# Altium PCB Project.PcbDoc
Units mm, origin at the board's own origin, x right, y up, seen from the top; angles counter-clockwise.
Board outline 70 x 75 mm, 4 copper layers (Top Layer, Layer 1, Layer 2, Bottom Layer), stack 1.641 mm thick; 75 components, 52 nets, 282 pads, 76 vias.
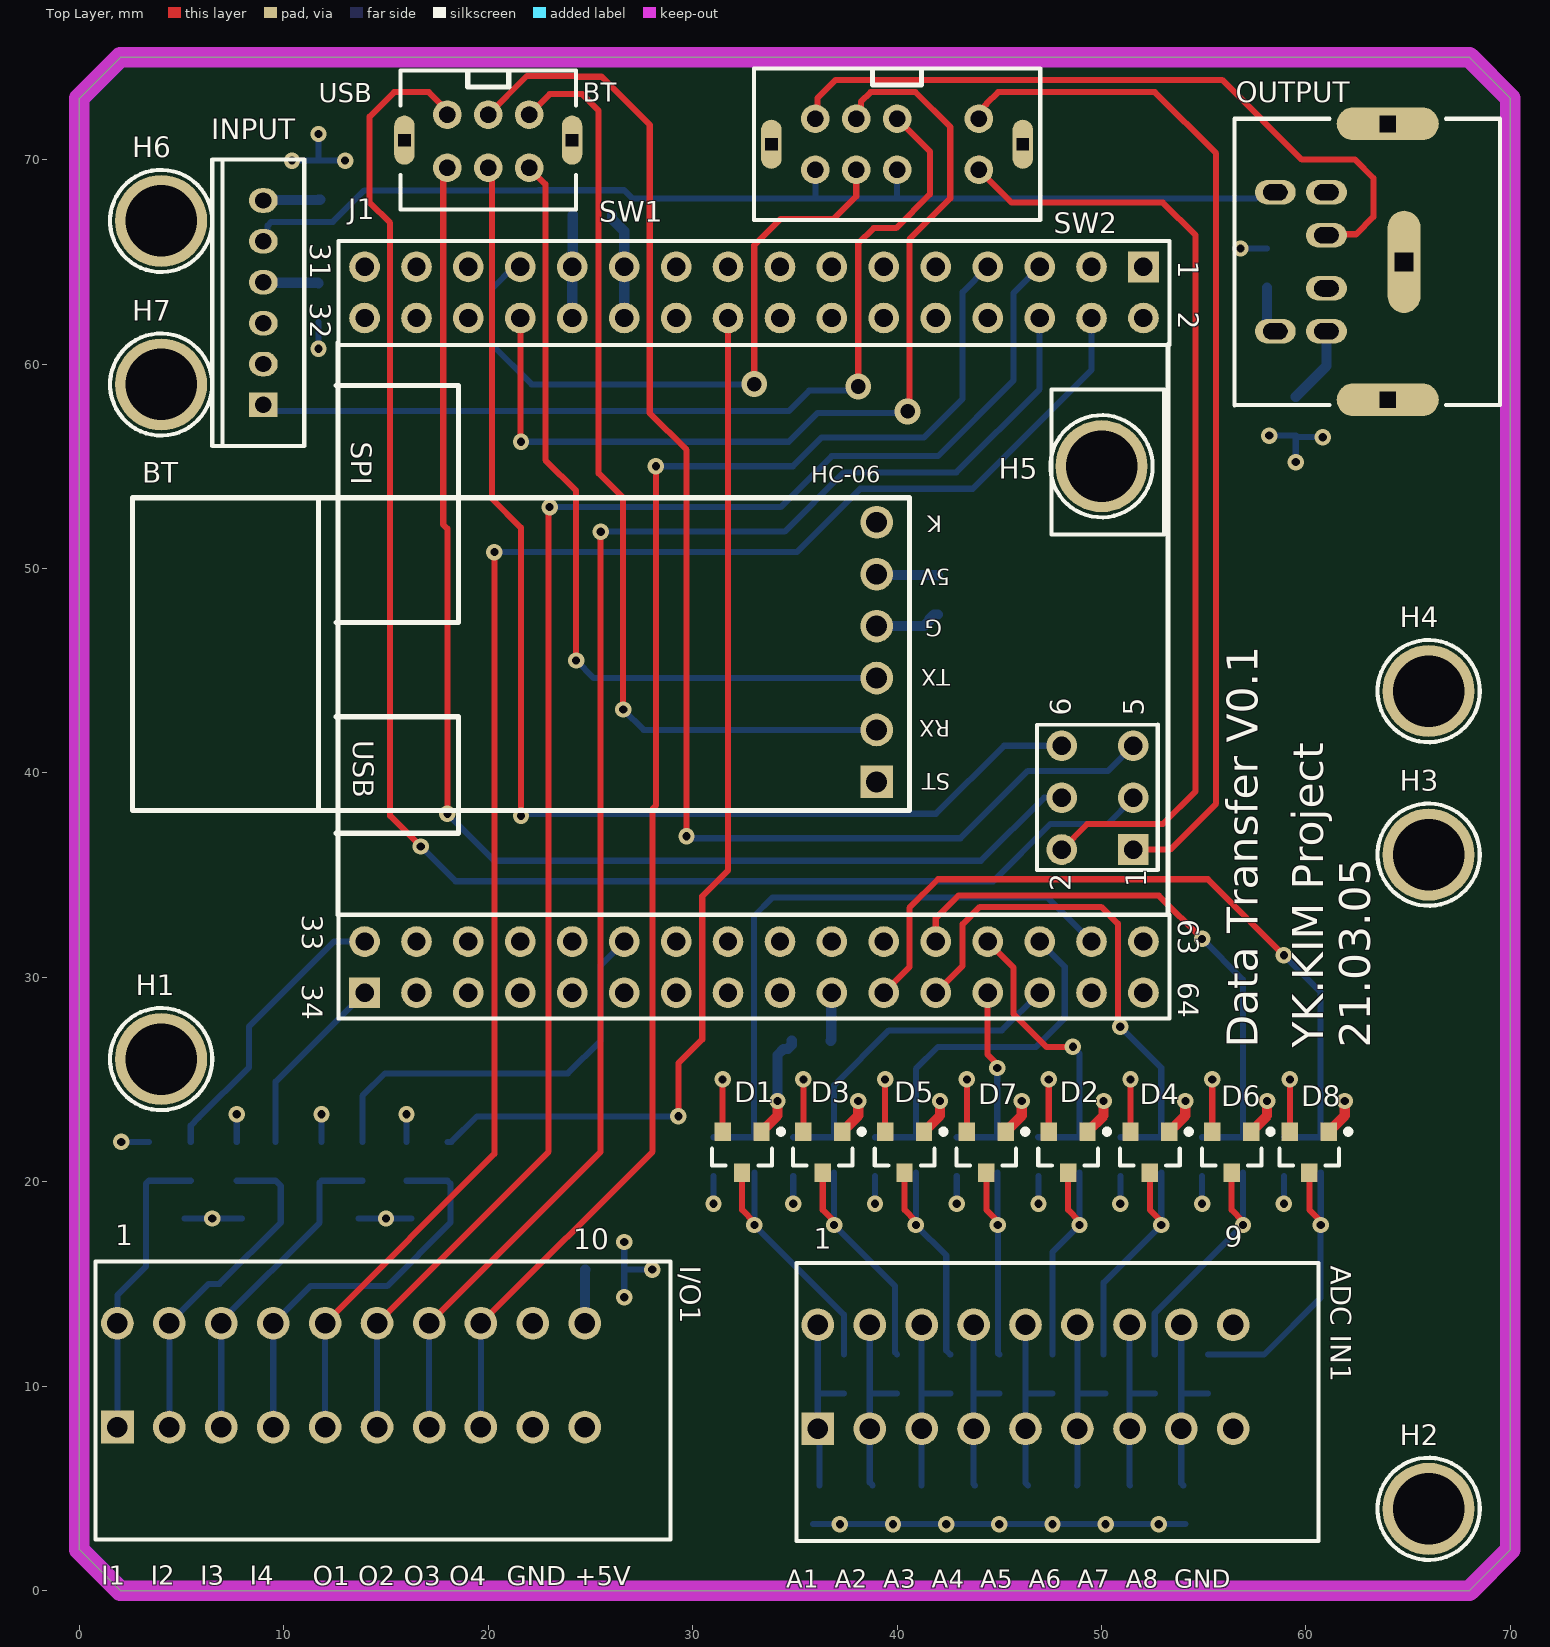
[diagram p0: Top Layer view]
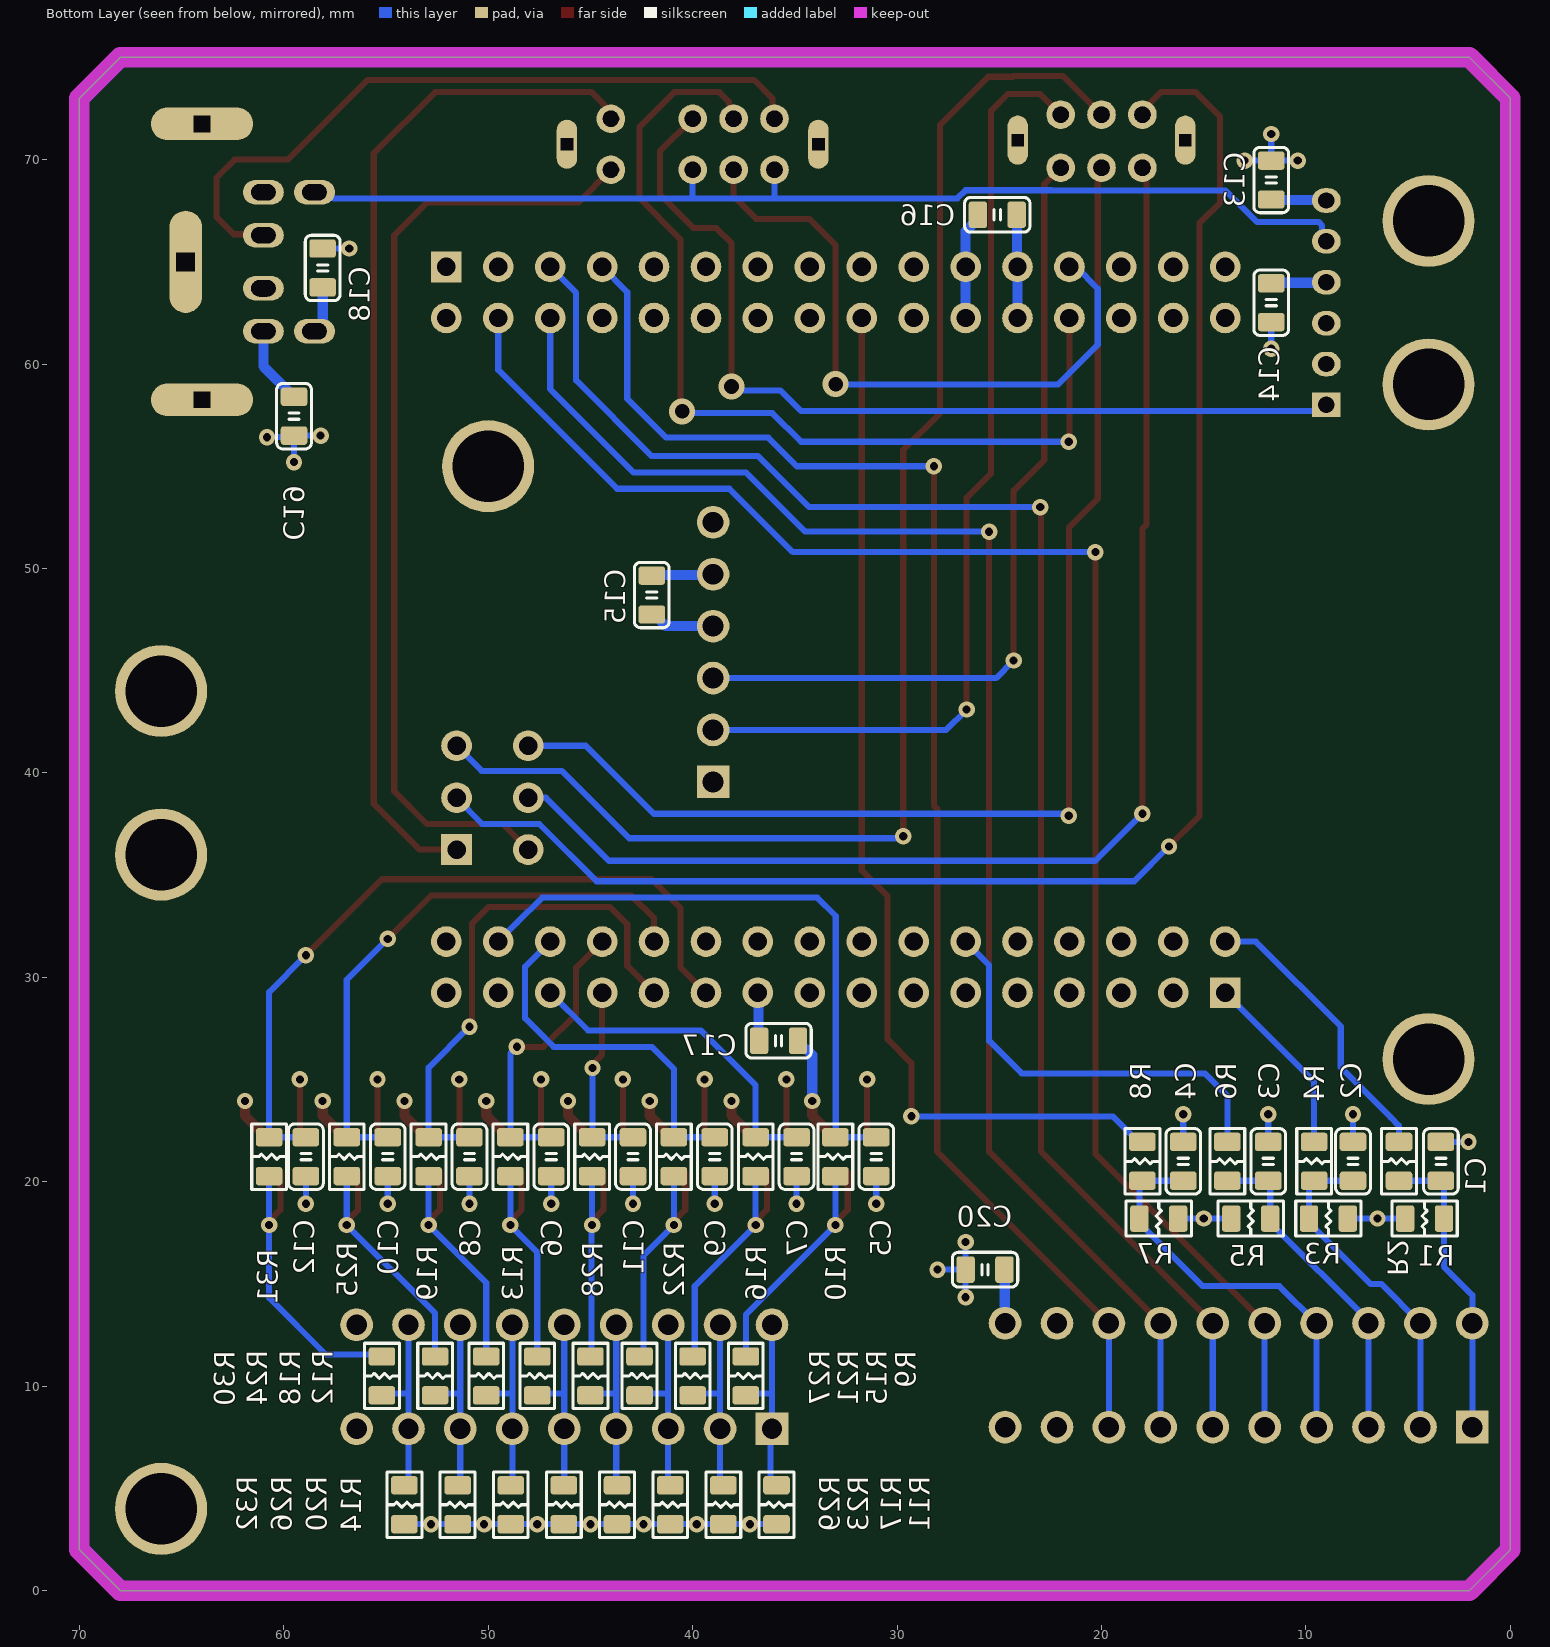
[diagram p1: Bottom Layer view, seen from below]
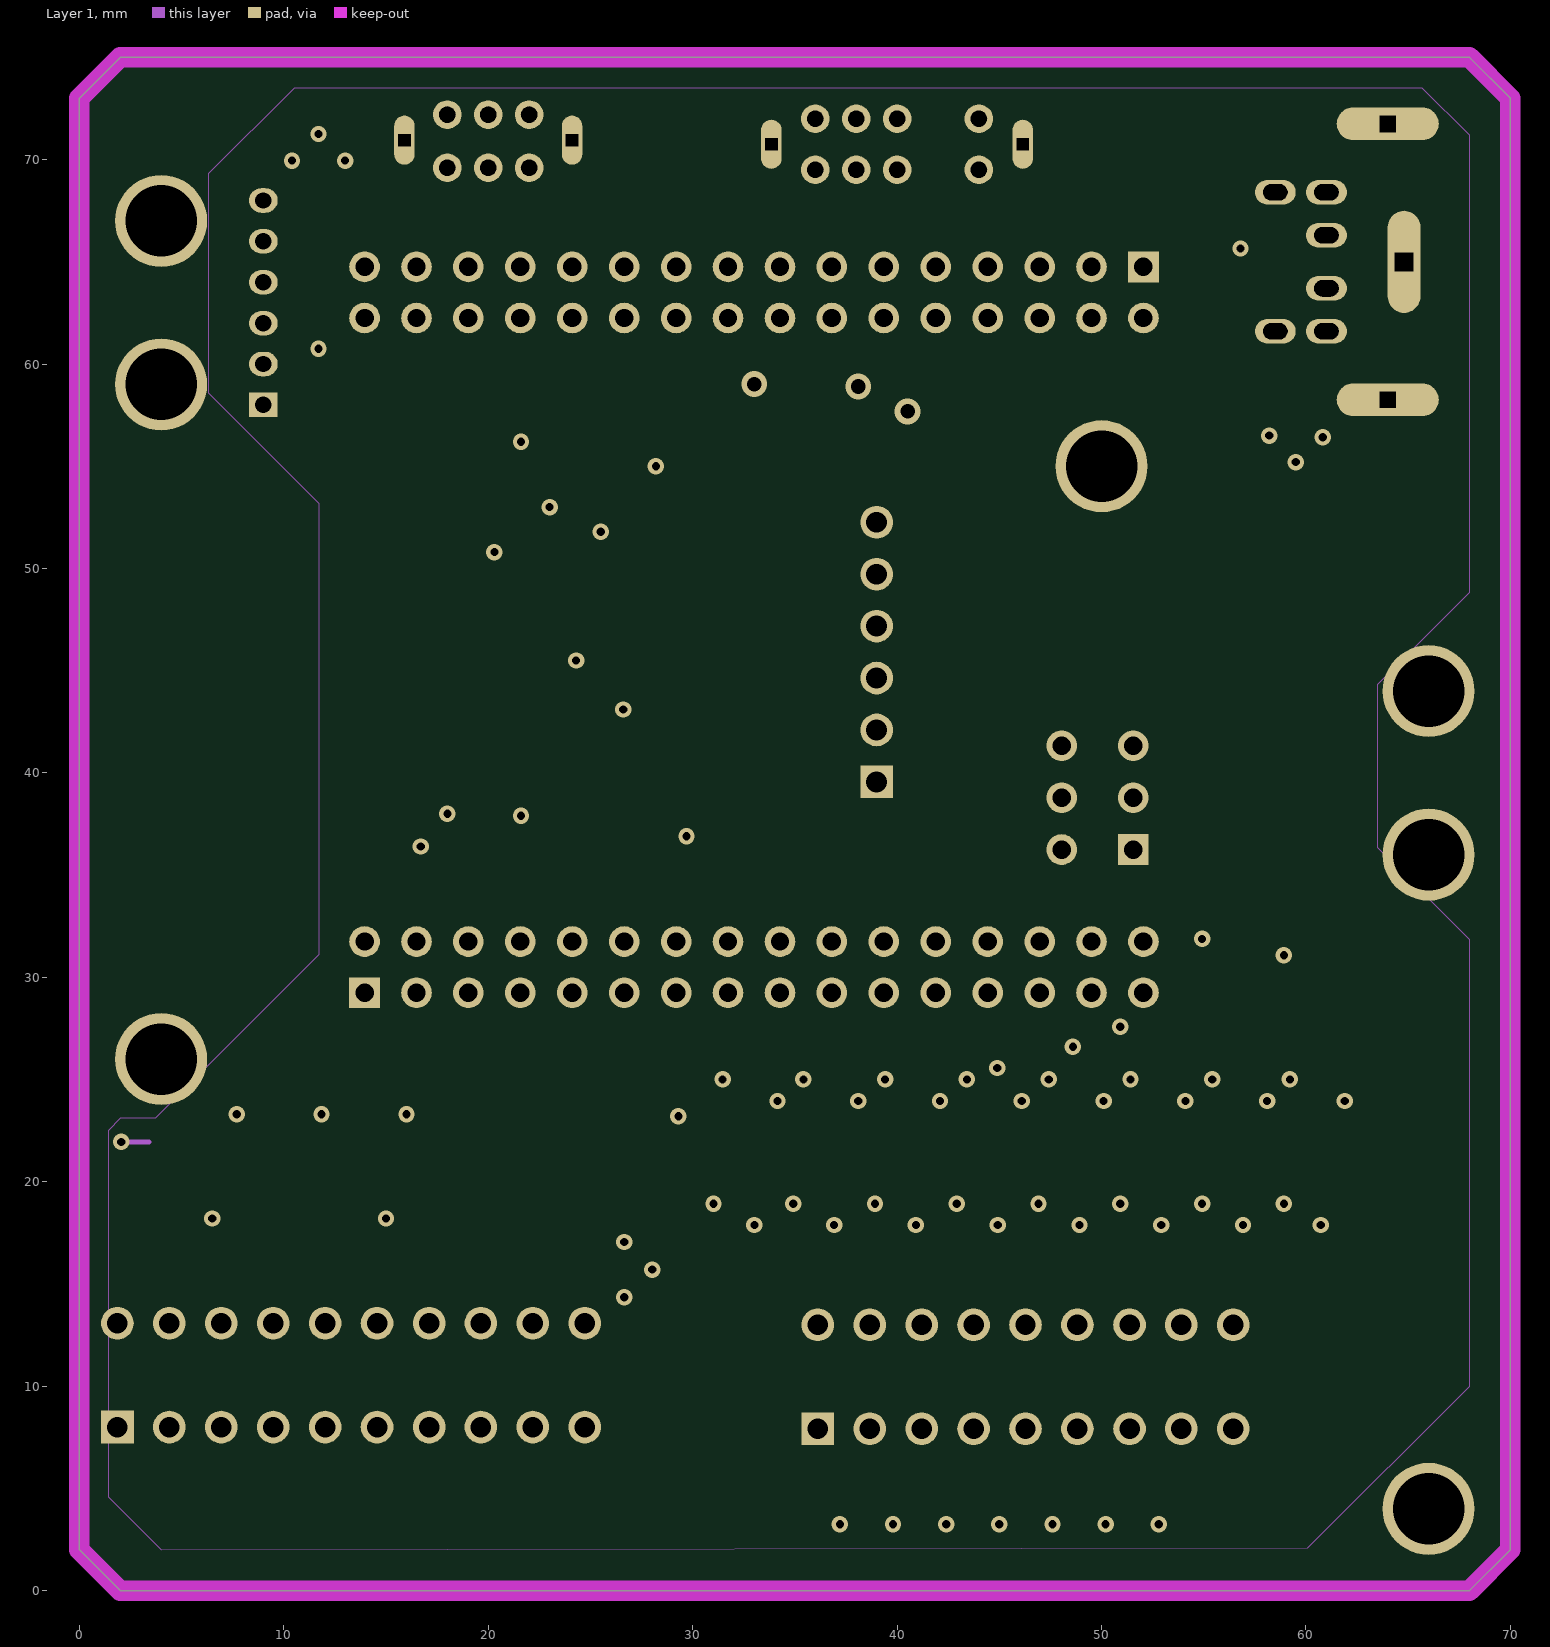
[diagram p2: Layer 1]
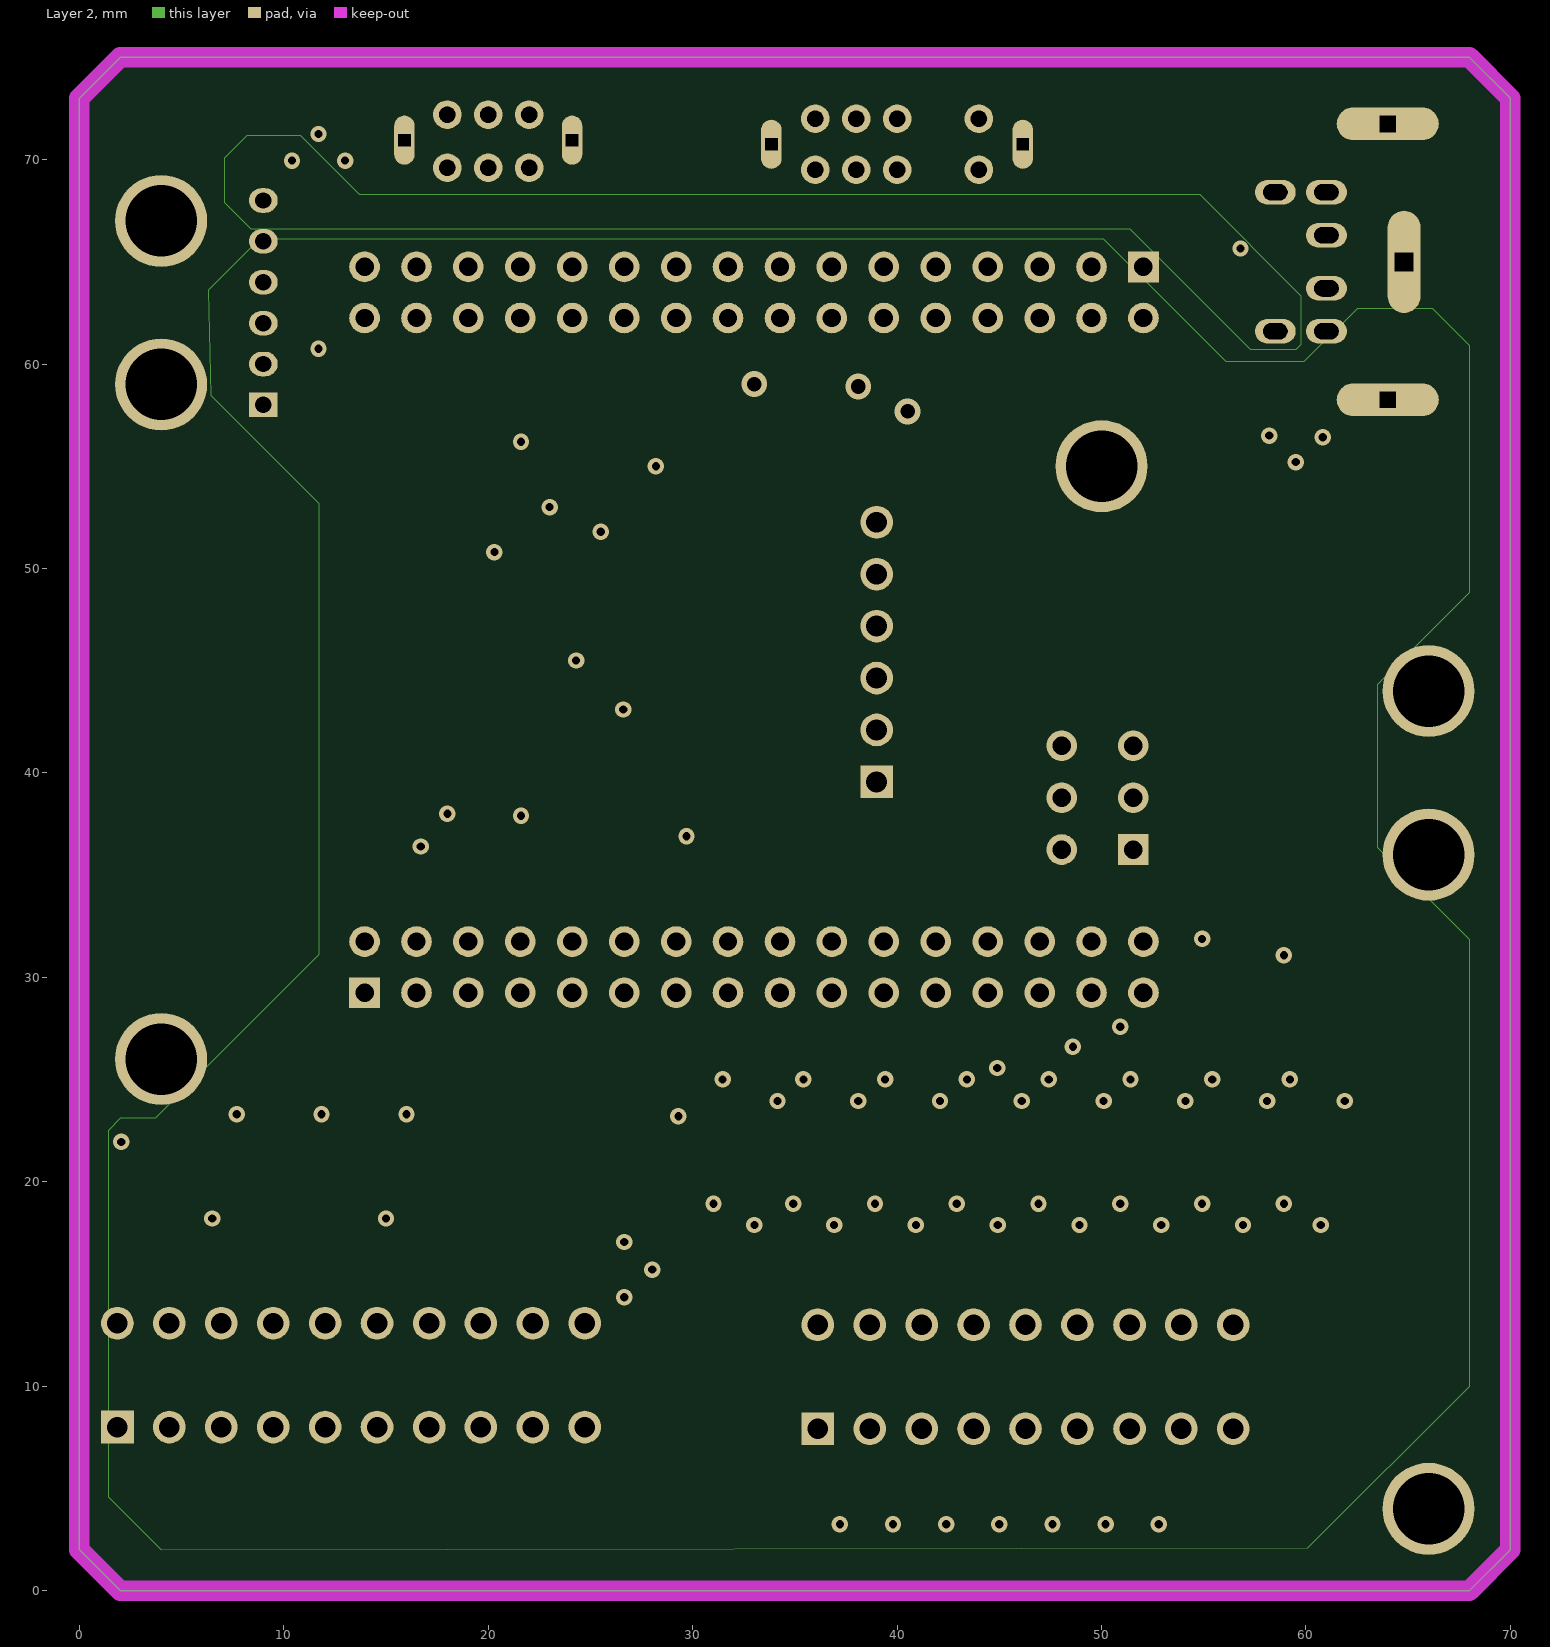
[diagram p3: Layer 2]
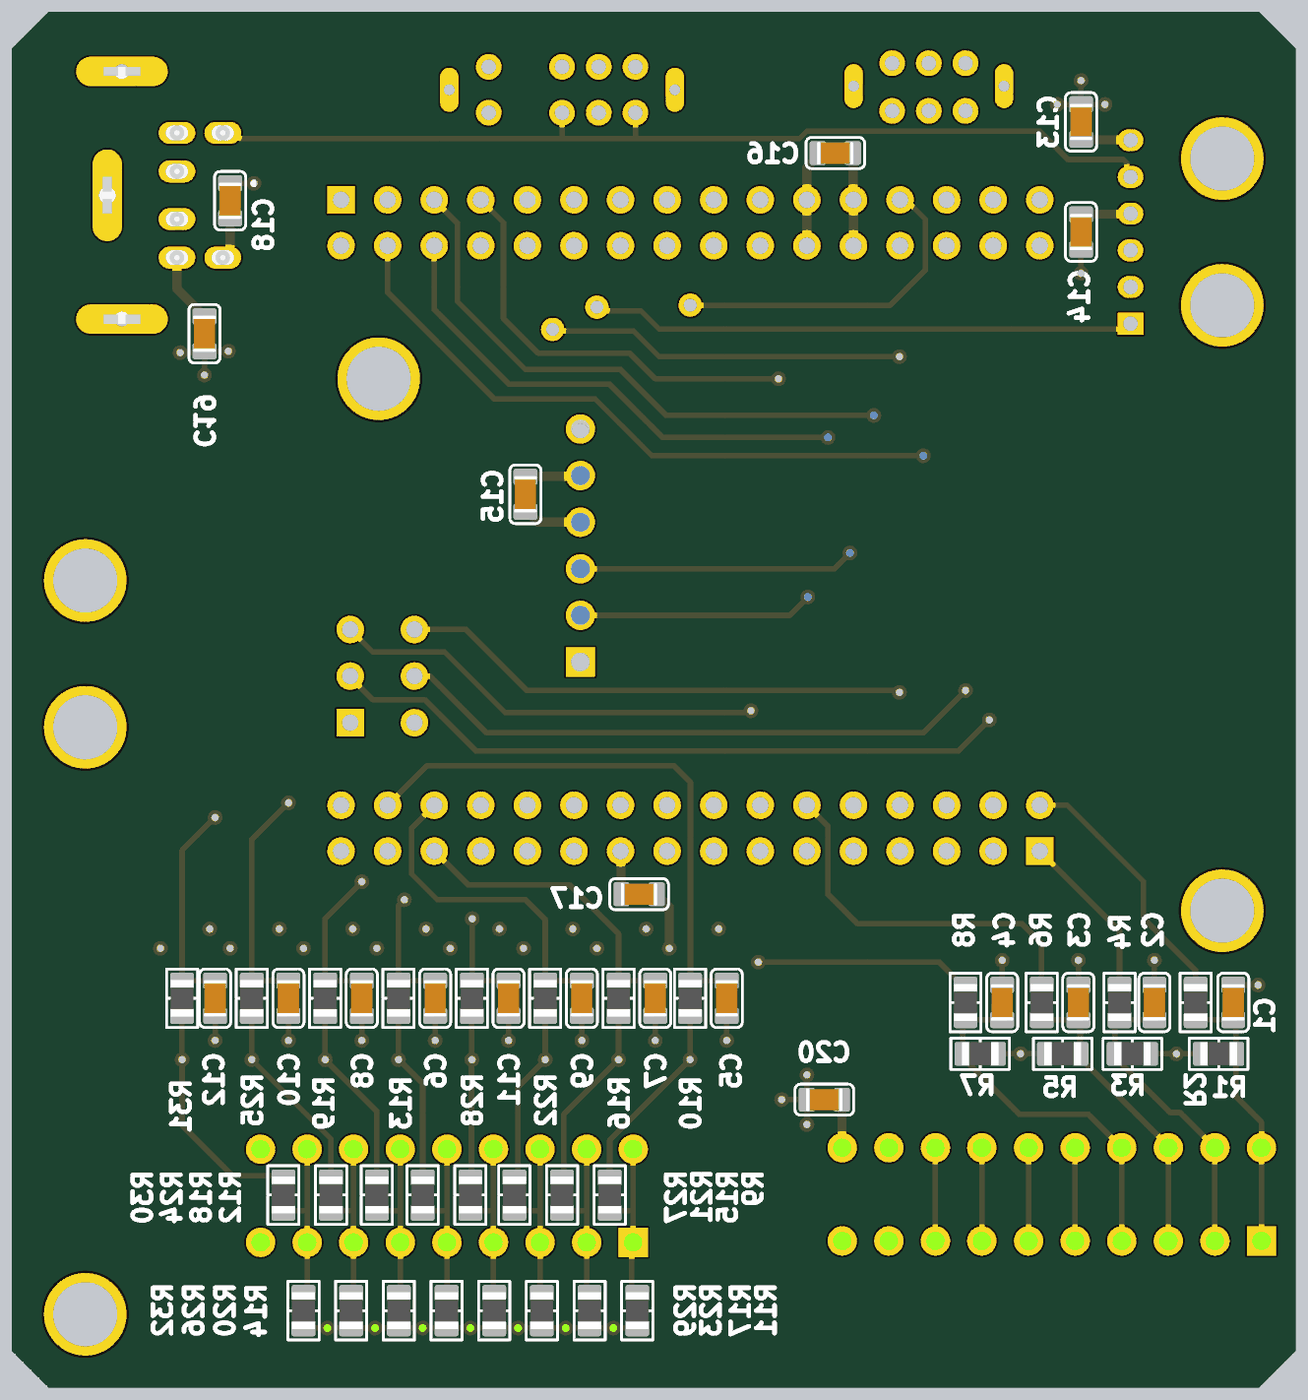
[diagram p4: 3D render of the assembled board from below, using the file's embedded part models]

## Layer stack, top to bottom
Top Solder: solder mask 0.0102, Solder Resist, Dk 3.5
Top Layer: signal copper 0.0356
Dielectric 2: prepreg 0.2, PP-006, Dk 4.1
Layer 1: signal copper 0.035
Dielectric 1: dielectric 1.1, FR-4, Dk 4.8
Layer 2: signal copper 0.035
Dielectric 3: prepreg 0.2, PP-006, Dk 4.1
Bottom Layer: signal copper 0.0356
Bottom Solder: solder mask 0.0102, Solder Resist, Dk 3.5

## Board outline
0,2 2,0 68,0 70,2 70,73 68,75 2,75 0,73

## Design rules (kind name [scope] priority, off if disabled: settings)
Clearance [InNetClass('PWR')] p1: gap=0.4 ignorepadtopadclearanceinfootprint=FALSE except(0.3: Arc-THPad Arc-Fill Arc-Poly Arc-Region Track-THPad Track-Fill Track-Poly Track-Region THPad-Fill THPad-Poly THPad-Region Via-Fill Via-Poly Via-Region Fill-Hole Poly-Hole Region-Hole)
Clearance Clearance_1 [All] p2: gap=0.254 ignorepadtopadclearanceinfootprint=FALSE
HoleSize [All] p1: absolutevalues=TRUE maxlimit=4 minlimit=0.025 maxpercent=80.000 minpercent=20.000
PlaneConnect [All] p1: planeconnectstyle=Direct reliefexpansion=0.508 reliefentries=4 reliefconductorwidth=0.2 reliefairgap=0.254
PolygonConnect [All] p1: connectstyle=Relief reliefconductorwidth=0.3 reliefentries=4 polygonreliefangle="90 Angle" airgapwidth=0.3
RoutingVias [All] p1: holewidth=0.6 width=1 viastyle="Through Hole" minholewidth=0.6 minwidth=1 maxholewidth=0.711 maxwidth=1.27
SilkToSilkClearance [All] p1: silktosilkclearance=0.1
SilkToSolderMaskClearance [IsPad] p1: minsilkscreentomaskgap=0.05 clearancetoexposedcopper=TRUE
SolderMaskExpansion [All] p1: expansion=0.102 istentingtop=FALSE
Width Width_PWR [InNetClass('PWR')] p1: maxlimit=0.5 minlimit=0.254 preferedwidth=0.5 midlayer1_maxwidth=0.254 midlayer1_prefwidth=0.254 midlayer2_maxwidth=0.254 midlayer2_prefwidth=0.254 minimp=50.000000 maximp=50.000000 favimp=50.000000
Width [All] p2: maxlimit=0.3 minlimit=0.254 preferedwidth=0.3 midlayer1_maxwidth=0.254 midlayer1_prefwidth=0.254 midlayer2_maxwidth=0.254 midlayer2_prefwidth=0.254 minimp=50.000000 maximp=50.000000 favimp=50.000000
26 further rules are at their usual default settings.

## Classes and differential pairs
net class PWR: 5V 12V GND
component class CON_MCU: "ADC IN1" BT C1 C2 C3 C4 C13 C14 C15 C16 C17 C18 C19 C20 H1 H2 H3 H4 H5 H6 H7 I/O1 INPUT J1 OUTPUT R1 R2 R3 R4 R5 R6 R7 R8 SW1 SW2
component class "ADC SCH": C5 C6 C7 C8 C9 C10 C11 C12 D1 D2 D3 D4 D5 D6 D7 D8 R9 R10 R11 R12 R13 R14 R15 R16 R17 R18 R19 R20 R21 R22 R23 R24 R25 R26 R27 R28 R29 R30 R31 R32

## Components (designator, comment, footprint, x,y, rotation, side; value= is the part's Value field where it differs from the comment)
"ADC IN1" "SL900R-9" SL-900R-9 46.28,10.46 r0 top
BT "HC-06" HC-06 39,39.56 r180 top
C1 "1nF" C2012 3.4,21 r270 bottom
C2 "1nF" C2012 7.7,21 r270 bottom
C3 "1nF" C2012 11.846,21 r270 bottom
C4 "1nF" C2012 16,21 r270 bottom
C5 "100pF" C2012 31.019,21.227 r270 bottom
C6 "100pF" C2012 46.919,21.227 r270 bottom
C7 "100pF" C2012 34.919,21.227 r270 bottom
C8 "100pF" C2012 50.919,21.227 r270 bottom
C9 "100pF" C2012 38.919,21.227 r270 bottom
C10 "100pF" C2012 54.919,21.227 r270 bottom
C11 "100pF" C2012 42.919,21.227 r270 bottom
C12 "100pF" C2012 58.919,21.227 r270 bottom
C13 "100nF" C2012 11.7,69 r90 bottom
C14 "100nF" C2012 11.7,63 r90 bottom
C15 "100nF" C2012 42,48.7 r90 bottom
C16 "100nF" C2012 25.1,67.3 r180 bottom
C17 "100nF" C2012 35.8,26.9 r0 bottom
C18 "100nF" C2012 58.1,64.7 r270 bottom
C19 "100nF" C2012 59.5,57.45 r90 bottom
C20 "100nF" C2012 25.7,15.7 r180 bottom
D1 "MMBZ33VALT1G" ONSC-SOT-23-3-318-08_V 32.415,21.45 r270 top
D2 "MMBZ33VALT1G" ONSC-SOT-23-3-318-08_V 48.365,21.45 r270 top
D3 "MMBZ33VALT1G" ONSC-SOT-23-3-318-08_V 36.365,21.45 r270 top
D4 "MMBZ33VALT1G" ONSC-SOT-23-3-318-08_V 52.365,21.45 r270 top
D5 "MMBZ33VALT1G" ONSC-SOT-23-3-318-08_V 40.365,21.45 r270 top
D6 "MMBZ33VALT1G" ONSC-SOT-23-3-318-08_V 56.365,21.45 r270 top
D7 "MMBZ33VALT1G" ONSC-SOT-23-3-318-08_V 44.365,21.45 r270 top
D8 "MMBZ33VALT1G" ONSC-SOT-23-3-318-08_V 60.165,21.45 r270 top
H1 "HOLE" HOLE_3MM 4,26 r0 top
H2 "HOLE" HOLE_3MM 66,4 r0 top
H3 "HOLE" HOLE_3MM 66,36 r0 top
H4 "HOLE" HOLE_3MM 66,44 r0 top
H5 "HOLE" HOLE_3MM 50,55 r0 top
H6 "HOLE" HOLE_3MM 4,67 r0 top
H7 "HOLE" HOLE_3MM 4,59 r0 top
I/O1 "SL900R-10" SL-900R-10 13.29,10.54 r0 top
INPUT "2.54mm 6 HOLE" "2.54mm 6 HOLE" 9,58 r90 top
J1 "ATMEL MODULE" "ATMEL MODULE" 33,47 r270 top
OUTPUT "MD-60S/DIN6PIN" "TAIT-MDS-508B6L_V - duplicate" 61.65,65 r180 top
R1 "1K" R2012 4.2,18.2 r0 bottom
R2 "10K" R2012 5.45,21 r270 bottom
R3 "1K" R2012 8.9,18.2 r180 bottom
R4 "10K" R2012 9.6,21 r270 bottom
R5 "1K" R2012 12.7,18.2 r0 bottom
R6 "10K" R2012 13.846,21 r270 bottom
R7 "1K" R2012 17.2,18.2 r180 bottom
R8 "10K" R2012 18,21 r270 bottom
R9 "1K" R2012 37.4,10.5 r270 bottom
R10 "1K" R2012 33.019,21.227 r270 bottom
R11 "1M" R2012 35.9,4.2 r270 bottom
R12 "1K" R2012 47.6,10.5 r270 bottom
R13 "1K" R2012 48.919,21.227 r270 bottom
R14 "1M" R2012 46.3,4.2 r270 bottom
R15 "1K" R2012 40,10.5 r270 bottom
R16 "1K" R2012 36.919,21.227 r270 bottom
R17 "1M" R2012 38.5,4.2 r270 bottom
R18 "1K" R2012 50.1,10.5 r270 bottom
R19 "1K" R2012 52.919,21.227 r270 bottom
R20 "1M" R2012 48.9,4.2 r270 bottom
R21 "1K" R2012 42.6,10.5 r270 bottom
R22 "1K" R2012 40.919,21.227 r270 bottom
R23 "1M" R2012 41.1,4.2 r270 bottom
R24 "1K" R2012 52.6,10.5 r270 bottom
R25 "1K" R2012 56.919,21.227 r270 bottom
R26 "1M" R2012 51.5,4.2 r270 bottom
R27 "1K" R2012 45,10.5 r270 bottom
R28 "1K" R2012 44.919,21.227 r270 bottom
R29 "1M" R2012 43.7,4.2 r270 bottom
R30 "1K" R2012 55.2,10.5 r270 bottom
R31 "1K" R2012 60.719,21.227 r270 bottom
R32 "1M" R2012 54.1,4.2 r270 bottom
SW1 "OS202011MA0QN1" OS202011MA0QN1 20,70.9 r270 top
SW2 "OS203011MA2QP1" OS203011MA2QP1 40,70.75 r270 top

## Footprints (in the part's own frame and the unit in brackets; to place one, negate y for a bottom-side part, rotate by r counter-clockwise, add the part's x,y. Pads: shape width x height; smd on the part's side, far side on the other; paste and mask are expansions set on the pad)
"2.54mm 6 HOLE" [mm] "Connector; Header; 6 Position"
  rect 1.2x1.4 hole 0.8: 1(0,0)
  oval 1.2x1.4 hole 0.8: 2(2,0) 3(4,0) 4(6,0) 5(8,0) 6(10,0)
  silkscreen extent -2,-2 12,2.5
"ATMEL MODULE" [mm] "Connector; Header; 16x2 Position"
  rect 1.5x1.5 hole 0.9: 1(-17.75,19.05) 34(17.75,-19.05) A1(10.75,18.55)
  round 1.5 hole 0.9: 2(-15.25,19.05) 3(-17.75,16.51) 4(-15.25,16.51) 5(-17.75,13.97) 6(-15.25,13.97) 7(-17.75,11.43) 8(-15.25,11.43) 9(-17.75,8.89) 10(-15.25,8.89) 11(-17.75,6.35) 12(-15.25,6.35) 13(-17.75,3.81) 14(-15.25,3.81) 15(-17.75,1.27) 16(-15.25,1.27) 17(-17.75,-1.27) 18(-15.25,-1.27) 19(-17.75,-3.81) 20(-15.25,-3.81) 21(-17.75,-6.35) 22(-15.25,-6.35) 23(-17.75,-8.89) 24(-15.25,-8.89) 25(-17.75,-11.43) 26(-15.25,-11.43) 27(-17.75,-13.97) 28(-15.25,-13.97) 29(-17.75,-16.51) 30(-15.25,-16.51) 31(-17.75,-19.05) 32(-15.25,-19.05) 33(15.25,-19.05) 35(15.25,-16.51) 36(17.75,-16.51) 37(15.25,-13.97) 38(17.75,-13.97) 39(15.25,-11.43) 40(17.75,-11.43) 41(15.25,-8.89) 42(17.75,-8.89) 43(15.25,-6.35) 44(17.75,-6.35) 46(17.75,-3.81) 47(15.25,-3.81) 47(15.25,-1.27) 48(17.75,-1.27) 49(15.25,1.27) 50(17.75,1.27) 51(15.25,3.81) 52(17.75,3.81) 53(15.25,6.35) 54(17.75,6.35) 55(15.25,8.89) 56(17.75,8.89) 57(15.25,11.43) 58(17.75,11.43) 59(15.25,13.97) 60(17.75,13.97) 61(15.25,16.51) 62(17.75,16.51) 63(15.25,19.05) 64(17.75,19.05) A2(10.75,15.05) A3(8.21,18.55) A4(8.21,15.05) A5(5.67,18.55) A6(5.67,15.05)
  silkscreen extent -19.02,-20.45 19.02,20.32
C2012 [mm]
  rrect30% 0.9x1.3 smd mask+0: 1(-0.95,0) 2(0.95,0)
  silkscreen extent -1.6,-0.85 1.6,0.85, body extent -1,-0.62 1,0.63, height 1.22
HC-06 [mm]
  rect 1.6x1.6 hole 1.02: 1(0,0)
  round 1.6 hole 1.02: 2(0,-2.54) 3(0,-5.08) 4(0,-7.62) 5(0,-10.16) 6(0,-12.7)
  silkscreen extent -1.6,-13.9 36.4,1.4, body extent -6.5,-13.75 36.25,1.25, height 8
HOLE_3MM [mm]
  round 4.5 hole 3.5 mask+0.127: 1(0,0)
  silkscreen extent -2.5,-2.5 2.5,2.5
ONSC-SOT-23-3-318-08_V [mm] "SOT23, 3-Leads, Body 2.92x1.3mm, Pitch 0.95mm"
  rect 0.9x0.8 smd: 1(-1,0.95) 2(-1,-0.95) 3(1,0)
  silkscreen extent -1.12,-1.46 0.65,2.03, body extent -0.65,-1.46 0.65,1.46, height 1.11
OS202011MA0QN1 [mm] "Mini DIN Connector"
  round 1.4 hole 0.8: 1(1.3,2) 2(1.3,0) 3(1.3,-2) 4(-1.3,2) 5(-1.3,0) 6(-1.3,-2)
  oval 2.4x1 hole 0.6 square: MH1(-0.05,4.1) MH2(-0.05,-4.1)
  silkscreen extent -3.45,-4.3 3.35,4.3
OS203011MA2QP1 [mm] "Mini DIN Connector"
  round 1.4 hole 0.8: 1(1.25,4) 2(1.25,0) 3(1.25,-2) 4(1.25,-4) 5(-1.25,4) 6(-1.25,0) 7(-1.25,-2) 8(-1.25,-4)
  oval 2.4x1 hole 0.6 square: MH1(0,6.15) MH2(0,-6.15)
  silkscreen extent -3.7,-7 3.7,7
R2012 [mm]
  rrect30% 0.9x1.3 smd mask+0: 1(-0.95,0) 2(0.95,0)
  silkscreen extent -1.6,-0.85 1.6,0.85, body extent -1,-0.62 1,0.63, height 0.59
SL-900R-9 [mm] "Connector; Header; 11x2 Position"
  rect 1.6x1.6 hole 1: 1(-10.16,-2.54)
  round 1.6 hole 1: 1(-10.16,2.54) 2(-7.62,-2.54) 2(-7.62,2.54) 3(-5.08,-2.54) 3(-5.08,2.54) 4(-2.54,-2.54) 4(-2.54,2.54) 5(0,-2.54) 5(0,2.54) 6(2.54,-2.54) 6(2.54,2.54) 7(5.09,-2.54) 7(5.09,2.54) 8(7.62,-2.54) 8(7.62,2.54) 9(10.16,-2.54) 9(10.16,2.54)
  silkscreen extent -11.2,-8.04 14.34,5.56, body extent -11.06,-8.04 11.8,5.56, height 13.29
SL-900R-10 [mm] "Connector; Header; 11x2 Position"
  rect 1.6x1.6 hole 1: 1(-11.43,-2.54)
  round 1.6 hole 1: 1(-11.43,2.54) 2(-8.89,-2.54) 2(-8.89,2.54) 3(-6.35,-2.54) 3(-6.35,2.54) 4(-3.81,-2.54) 4(-3.81,2.54) 5(-1.27,-2.54) 5(-1.27,2.54) 6(1.27,-2.54) 6(1.27,2.54) 7(3.82,-2.54) 7(3.82,2.54) 8(6.35,-2.54) 8(6.35,2.54) 9(8.89,-2.54) 9(8.89,2.54) 10(11.43,-2.54) 10(11.43,2.54)
  silkscreen extent -12.5,-8.04 15.62,5.56, body extent -12.33,-8.04 13.07,5.56, height 13.29
"TAIT-MDS-508B6L_V - duplicate" [mm] "Mini DIN Connector"
  oval 2x1.2 hole 1.2 slot 0.8 at 90 deg: 1(0.65,-1.3) 2(0.65,1.3) 3(0.65,-3.4) 4(0.65,3.4) 5(3.15,-3.4) 6(3.15,3.4)
  oval 1.6x5 hole 0.9 square: 7(-3.15,0)
  oval 5x1.6 hole 0.8 square: MH1(-2.35,-6.75) MH2(-2.35,6.75)
  silkscreen extent -7.85,-7 5.15,7.02, body extent -7.85,-7 4.95,7, height 13.1

## Part data
"ADC IN1": library part "Header 9", "Header, 9-Pin", LatestRevisionDate=17-Jul-2002, LatestRevisionNote="Re-released for DXP Platform.", Publisher="Altium Limited"
BT INPUT: library part "Header 6", "Header, 6-Pin", LatestRevisionDate=17-Jul-2002, LatestRevisionNote="Re-released for DXP Platform.", Publisher="Altium Limited"
C1 C2 C3 C4 C5 C6 C7 C8 C9 C10 C11 C12 C13 C14 C15 C16 C17 C18 C19 C20: library part CAP, Manufacturer="AVX Interconnect / Elco", Part Number=08051A102JAT2A
D1 D2 D3 D4 D5 D6 D7 D8: library part ONSC-K1K2A3-3, "40 W Peak Power Zener Transient Voltage Suppressor, Dual Common Anode Zeners for ESD Protection, 3-Pin SOT-23, Pb-Free, Tape and Reel", Manufacturer="On Semiconductor", ComponentLink1Description="Manufacturer URL", ComponentLink1URL=http://www.onsemi.com/, ComponentLink2Description=Datasheet, ComponentLink2URL=http://www.onsemi.com/pub_link/Collateral/MMBZ5V6ALT1-D.PDF, ComponentLink3Description="Package Specification", ComponentLink3URL=http://www.onsemi.cn/pub_link/Collateral/318-08.PDF, DatasheetVersion="Rev. 13", Direction=Unidirectional, IR Max (uA)=0.05, Mounting Technology="Surface Mount", PackageDescription="3-Pin Small Outline Transistor, Body 2.92 x 1.3 mm, Pitch 0.95 mm", PackageReference=SOT-23-3-318-08, PackageVersion="Rev. AP, 11/2009", Packing="Tape and Reel", PartNumber=MMBZ33VALT1G, PPK Max (W)=40, RoHS=Pb-Free, V(BR) Typ (V)=33
H1 H2 H3 H4 H5 H6 H7: library part MH
I/O1: library part "Header 10", "Header, 10-Pin", LatestRevisionDate=17-Jul-2002, LatestRevisionNote="Re-released for DXP Platform.", Publisher="Altium Limited"
OUTPUT: library part CUI-MD-60S-6, "Right Angle Mini DIN Connector, 100 Vac, 12 Vdc, -40 to 85 degC, 6-Pin THD, RoHS, Bulk", Current Rating=1A,2A, Manufacturer="CUI Inc", Operating Temperature=-40°C~85°C, Package Description="6-Pin Through Hole Device, Body 14 x 12.4 mm, Height 13.1 mm", Package Reference=MD-60S, Standard Package=300, Voltage - Rated=100VAC,12VDC, 3D Model=MD-60S, Category=Connectors,Interconnects, Connector Type=Receptacle,FemaleSockets, Contact Finish=Silver, Contact Finish Thickness=-, Datasheet URL=http://www.cui.com/product/resource/md-xxs.pdf, Datasheet Version="Rev. 1.02, 03/2012", Family=CircularConnectors, Fastening Type=Push-Pull, Features=-, Ingress Protection=-, Manufacturer URL=http://www.cui.com/, Mating Products=CP-2060-ND-CONNMINI-DIN6PINMALE, Mounting Technology=ThroughHole, Mounting Type=ThroughHole,RightAngle, Number of Positions=6, Online Catalog=MD, Orientation=Keyed, Other Names=045-0036RCP-2460MD60S, Packaging=Bulk, RoHS Information=MD-x0SCertofCompliance, Series=MD, Shell Material, Finish=PolybutyleneTerephthalate(PBT), Shell Size - Insert=MiniDIN, Shell Size, MIL=-, Termination=Solder
R1 R2 R3 R4 R5 R6 R7 R8 R9 R10 R11 R12 R13 R14 R15 R16 R17 R18 R19 R20 R21 R22 R23 R24 R25 R26 R27 R28 R29 R30 R31 R32: library part RES-2, "Chip Resistor, 4.7 KOhm, +/- 1%, 0.125 W, -55 to 155 degC, 0805 (2012 Metric), RoHS, Tape and Reel", Case Code (Imperial)=0805, Case Code (Metric)=2012, Manufacturer="Vishay Semiconductor", Max Operating Temperature=155degC, Max Power Dissipation=125mW, Min Operating Temperature=-55degC, Package Description="2-Pin Surface Mount Device, Body 2.05 x 1.25 mm", Package Quantity=10, Resistance=4.7KOhm, Temperature Coefficient=100ppm/degreesC, Tolerance=1%, Voltage Rating=150V, Case/Package=0805, Composition=ThickFilm, Contact Plating=Tin, Datasheet URL=https://datasheet.ciiva.com/11808/0900766b80d98b26-11808992.pdf, Datasheet Version=41061.0, Depth=1.25mm, Height=0.45mm, Lead Free=LeadFree, Length=2mm, Manufacturer URL=http://www.vishay.com/, Military Standard=Not, Number of Terminations=2, Package Reference=0805, Packaging=TapeandReel, Power Rating=125mW, Radiation Hardening=No, REACH SVHC=Unknown, RoHSCompliant=true, Termination=SMD/SMT, Voltage Rating (DC)=150V, Weight=0.000194oz, Width=1.25mm
SW1: library part SW-DPDT-6, "Slide Switch, MHS Series, Double Pole, Vertical, 125 V (AC), -20 to 85 degC, 6-Pin THD, RoHS, Bulk", ComponentLink1Description="Manufacturer URL", ComponentLink1URL=http://www.te.com/, ComponentLink2Description=Datasheet, ComponentLink2URL=http://www.te.com/commerce/DocumentDelivery/DDEController?Action=showdoc&DocId=Catalog+Section%7F1308111-1_SWITCHES_CORE_PROGRAM_CATALOG%7F0308%7Fpdf%7FEnglish%7FENG_CS_1308111-1_SWITCHES_CORE_PROGRAM_CATALOG_0308.pdf%7F1825289-1, ComponentLink3Description="Package Specification", ComponentLink3URL=http://www.te.com/commerce/DocumentDelivery/DDEController?Action=showdoc&DocId=Customer+Drawing%7F1825289%7FB3%7Fpdf%7FEnglish%7FENG_CD_1825289_B3.pdf%7F1825289-1, DatasheetVersion=Mar-08, PackageDescription="6-Pin Through Hole Device, Body 16 x 6.7 mm, Height 12.05 mm", PackageReference=1825289-1
SW2: library part CMP-17877-000002-1, "SWITCH SLIDE DP3T 200MA 30V", Contact Resistance=20mΩ, Current Rating=0.2A, Manufacturer=E-Switch, Manufacturer Part Number=EG2301, Temperature="-20°C to +70°C", Temperature Range High=+70°C, Temperature Range Low=-20°C, Voltage Rating Dc=30V, Automotive=No, Category=Switch, ComponentLink2Description=Datasheet, ComponentLink2URL=https://www.e-switch.com/system/asset/product_line/data_sheet/119/EG.pdf, Device Class L1=Electromechanical, Device Class L2=Switches, Device Class L3="Slide Switches", Digikey Description="SWITCH SLIDE DP3T 200MA 30V", Electromechanical Life=10000Cycles, Footprint Url=http://spec_sheets.e-switch.com/specs/P040180.pdf, Height=11.8mm, Lead Free=Yes, Manufacturer 1=E-Switch, Manufacturer Part Number 1=EG2301, Mount="Through Hole", Mouser Description="Slide Switches DP3T PC MNT SLIDE", Octopart=https://octopart.com/eg2301-e-switch-1438660, Package=EG2301, RoHS=TRUE, Throw Configuration=DP3T

## Via types
v1: diameter 0.8/0.8/0.8/0.8 (per signal layer), hole 0.4, Top Layer to Bottom Layer, tented both sides, 73 vias
v2: diameter 1.27/1.27/1.27/1.27 (per signal layer), hole 0.711, Top Layer to Bottom Layer, 3 vias

## Nets (pads, with @x,y where several pads share a name; then routed paths per layer and width w, separated by ;. In a path a pad name is that pad's centre, name@x,y a point inside that pad or via, vN(x,y) a via of type N, cw(c..) or ccw(c..) an arc to the next point about the centre after c; other vN are vias at no path point)
5V: BT.5 C14.2 C15.2 C16.2 C17.2 C19.2 C20.2 D1.2 D2.2 D3.2 D4.2 D5.2 D6.2 D7.2 D8.2 I/O1.10 INPUT.4 J1.23 J1.24 J1.52 OUTPUT.4 R1.2 R3.2 R5.2 R7.2 | length 45.5
  Top Layer w0.3: D1.2 v1(31.465,25.008) ; D3.2 v1(35.415,25.008) ; D5.2 v1(39.415,25.008) ; D7.2 v1(43.415,25.008) ; D2.2 v1(47.415,25.008) ; D4.2 v1(51.415,25.008) ; D6.2 v1(55.415,25.008) ; D8.2 v1(59.215,25.008)
  Bottom Layer w0.3: R1.2 v1(6.5,18.2) R3.2 ; R5.2 v1(15,18.2) R7.2
  Bottom Layer w0.5: INPUT.4 9.025,63.975 11.675,63.975 C14.2 ; J1.24 J1.23 24.13,64.77 24.13,67.28 C16.2 ; I/O1.10@24.72,13.08 24.735,13.095 24.735,15.685 C20.2 ; C17.2 36.78,26.93 36.78,29.22 J1.52 ; BT.5 39.035,49.685 41.965,49.685 C15.2 ; C19.2 61,59.9 OUTPUT.4
12V: C13.1 C18.2 INPUT.6 OUTPUT.6 | length 5.1
  Bottom Layer w0.5: INPUT.6 9.025,68.025 11.675,68.025 C13.1 ; C13.1@11.775,68.025 C13.1@11.8,68.05 ; C18.2 58.1,61.923 58.423,61.6 OUTPUT.6
ADC_IN_0: "ADC IN1.1" R9.2 R11.1 | length 9.2
  Bottom Layer w0.3: 36.12,13 36.12,9.6 ; R11.1@36.2,5.15 36.2,7.84 36.12,7.92 36.12,9.6 ; R9.2@37.4,9.65 36.17,9.65 36.12,9.6
ADC_IN_1: "ADC IN1.2" R15.2 R17.1 | length 9.3
  Bottom Layer w0.3: 38.66,13 38.66,9.6 ; R17.1@38.8,5.15 38.66,5.29 38.66,7.92 38.66,9.6 ; R15.2@40,9.65 38.71,9.65 38.66,9.6
ADC_IN_2: "ADC IN1.3" R21.2 R23.1 | length 9.3
  Bottom Layer w0.3: R23.1@41.2,5.15 41.2,7.92 41.2,9.6 ; 41.2,13 41.2,9.6 ; R21.2@42.6,9.65 41.25,9.65 41.2,9.6
ADC_IN_3: "ADC IN1.4" R27.2 R29.1 | length 9.2
  Bottom Layer w0.3: 43.74,13 43.74,9.6 ; R29.1@43.8,5.15 43.74,5.21 43.74,7.92 43.74,9.6 ; R27.2@45,9.65 43.79,9.65 43.74,9.6
ADC_IN_4: "ADC IN1.5" R12.2 R14.1 | length 9.2
  Bottom Layer w0.3: 46.28,13 46.28,9.6 ; R14.1@46.4,5.15 46.28,5.27 46.28,7.92 46.28,9.6 ; R12.2@47.6,9.65 46.33,9.65 46.28,9.6
ADC_IN_5: "ADC IN1.6" R18.2 R20.1 | length 9.3
  Bottom Layer w0.3: R20.1@48.8,5.15 48.82,5.17 48.82,7.92 48.82,9.6 ; 48.82,13 48.82,9.6 ; R18.2@50.2,9.65 48.87,9.65 48.82,9.6
ADC_IN_6: "ADC IN1.7" R24.2 R26.1 | length 9.1
  Bottom Layer w0.3: 51.37,13 51.37,9.6 ; R26.1@51.4,5.15 51.37,5.18 51.37,7.92 51.37,9.6 ; R24.2@52.6,9.65 51.42,9.65 51.37,9.6
ADC_IN_7: "ADC IN1.8" R30.2 R32.1 | length 9.2
  Bottom Layer w0.3: 53.9,13 53.9,9.6 ; R32.1@54,5.15 53.9,5.25 53.9,7.92 53.9,9.6 ; R30.2@55.2,9.65 53.95,9.65 53.9,9.6
BT(RX0): BT.2 SW1.4 | length 46.8
  Top Layer w0.3: SW1.4 23,73.2 24.6,73.2 25.4,72.4 25.4,54.66 26.6,53.46 v1(26.6,43.1)
  Bottom Layer w0.3: v1(26.6,43.1) 27.6,42.1 BT.2
BT(TX0): BT.3 SW1.1 | length 40.1
  Top Layer w0.3: SW1.1 22.8,68.8 22.8,55.3 24.3,53.8 v1(24.3,45.5)
  Bottom Layer w0.3: v1(24.3,45.5) 25.16,44.64 BT.3
GND: "ADC IN1.9" BT.4 C1.1 C2.1 C3.1 C4.1 C5.2 C6.2 C7.2 C8.2 C9.2 C10.2 C11.2 C12.2 C13.2 C14.1 C15.1 C16.1 C17.1 C18.1 C19.1 C20.1 D1.1 D2.1 D3.1 D4.1 D5.1 D6.1 D7.1 D8.1 I/O1.9 INPUT.3 J1.21 J1.22 J1.53 J1.63 OUTPUT.3 OUTPUT.7 R11.2 R14.2 R17.2 R20.2 R23.2 R26.2 R29.2 R32.2 SW1.MH1 SW1.MH2 SW2.MH1 SW2.MH2 | length 76.7
  Top Layer w0.5: D1.1 34.15,23.235 v1(34.15,23.95) ; D3.1 38.1,23.235 v1(38.1,23.95) ; D5.1 42.1,23.235 v1(42.1,23.95) ; D7.1 46.1,23.235 v1(46.1,23.95) ; D2.1 50.1,23.235 v1(50.1,23.95) ; D4.1 54.1,23.235 v1(54.1,23.95) ; D6.1 58.1,23.235 v1(58.1,23.95) ; D8.1 61.9,23.235 v1(61.9,23.95)
  Layer 1 w0.254: v1(2.05,21.95) 3.4,21.95
  Bottom Layer w0.3: v1(2.05,21.95) C1.1 ; C2.1@7.7,21.95 v1(7.7,23.3) ; v1(10.4,69.95) C13.2 ; v1(11.7,60.75) C14.1 ; v1(11.7,71.25) C13.2 ; C3.1 v1(11.846,23.3) ; v1(13,69.95) C13.2 ; C4.1 v1(16,23.3) ; v1(26.65,14.35) C20.1 v1(26.65,17.05) ; C20.1@26.676,15.7 v1(28.026,15.7) ; v1(31.019,18.927) C5.2 ; v1(34.919,18.927) C7.2 ; R11.2 v1(37.2,3.25) R17.2 v1(39.8,3.25) v1(42.4,3.25) R29.2 ; v1(38.919,18.927) C9.2 ; v1(42.919,18.927) C11.2 ; R29.2 v1(45,3.25) R14.2 v1(47.6,3.25) v1(50.2,3.25) v1(52.8,3.25) R32.2 ; v1(46.919,18.927) C6.2 ; v1(50.919,18.927) C8.2 ; v1(54.919,18.927) C10.2 ; v1(56.8,65.65) C18.1 ; v1(58.2,56.5) C19.1 v1(59.5,55.2) ; v1(58.919,18.927) C12.2 ; C19.1@59.524,56.422 v1(60.824,56.422)
  Bottom Layer w0.5: C16.1 26.05,67.1 26.65,66.5 J1.21 J1.22 ; v1(34.15,23.95) 34.15,26.2 34.45,26.5 34.65,26.5 34.85,26.7 C17.1 ; BT.4 41.307,47.18 41.6,47.473 41.6,47.55 41.8,47.75 C15.1
IN_RX(SDA): INPUT.1 SW2.6 | length 45.6
  Top Layer w0.3: v2(38.1,58.9) 38.1,65.9 38.85,66.65 39.95,66.65 41.6,68.3 41.6,70.4 SW2.6
  Bottom Layer w0.3: INPUT.1 9.3,57.7 34.7,57.7 35.7,58.7 37.9,58.7 v2(38.1,58.9)
IN_TX(SCL): INPUT.5 OUTPUT.5 SW2.2 SW2.4 | length 53.9
  Bottom Layer w0.3: INPUT.5 9.211,66.211 9.211,66.774 9.386,66.95 12.399,66.95 13.945,68.496 22.457,68.496 22.461,68.5 26.649,68.5 27.049,68.1 36,68.1 40,68.1 ; 36,68.2 SW2.4 ; SW2.2 40,68.1 ; OUTPUT.5 57.856,68.4 57.556,68.1 40,68.1
NetD1_3: D1.3 R9.1 R10.2 | length 13.5
  Top Layer w0.3: D1.3 32.415,18.621 33.019,18.017 v1(33.019,17.881)
  Bottom Layer w0.3: R10.2@33.019,20.439 R10.2 v1(33.019,17.881) 37.4,13.5 R9.1@37.4,11.55
NetD2_3: D2.3 R12.1 R13.2 | length 12.2
  Top Layer w0.3: D2.3 48.365,18.624 48.919,18.07 v1(48.919,17.881)
  Bottom Layer w0.3: R12.1@47.6,11.55 47.6,16.562 v1(48.919,17.881) R13.2 R13.2@48.919,20.439
NetD3_3: D3.3 R15.1 R16.2 | length 13
  Top Layer w0.3: D3.3 36.365,18.624 36.919,18.07 v1(36.919,17.881)
  Bottom Layer w0.3: R16.2@36.919,20.439 v1(36.919,17.881) 39.9,14.9 39.9,11.65 R15.1@40,11.55
NetD4_3: D4.3 R18.1 R19.2 | length 12.9
  Top Layer w0.3: D4.3 52.365,18.624 52.919,18.07 v1(52.919,17.881)
  Bottom Layer w0.3: R18.1@50.1,11.55 50.1,15.062 v1(52.919,17.881) R19.2 R19.2@52.919,20.439 ; R19.2@52.915,20.435 R19.2@52.93,20.45
NetD5_3: D5.3 R21.1 R22.2 | length 12.4
  Top Layer w0.3: D5.3 40.365,18.624 40.919,18.07 v1(40.919,17.881)
  Bottom Layer w0.3: R22.2@40.919,20.439 v1(40.919,17.881) 42.404,16.396 42.404,11.746 R21.1@42.6,11.55
NetD6_3: D6.3 R24.1 R25.2 | length 13.5
  Top Layer w0.3: D6.3 56.365,18.624 56.919,18.07 v1(56.919,17.881)
  Bottom Layer w0.3: R24.1@52.6,11.55 52.6,13.562 v1(56.919,17.881) R25.2@56.919,20.439
NetD7_3: D7.3 R27.1 R28.2 | length 11.7
  Top Layer w0.3: D7.3 44.365,18.624 44.919,18.07 v1(44.919,17.881)
  Bottom Layer w0.3: R28.2@44.919,20.439 v1(44.919,17.881) 44.944,17.856 44.944,11.606 R27.1@45,11.55
NetD8_3: D8.3 R30.1 R31.2 | length 15.6
  Top Layer w0.3: D8.3 60.165,18.624 60.719,18.07 v1(60.719,17.881)
  Bottom Layer w0.3: R30.1@55.2,11.55 57.95,11.55 60.719,14.319 v1(60.719,17.881) 60.724,17.887 R31.2@60.724,20.444
NetJ1_A1: J1.A1 SW2.5 | length 49.7
  Top Layer w0.3: SW2.5@44.225,72.55 44.372,72.697 44.372,72.725 44.947,73.3 52.6,73.3 55.6,70.3 55.6,38.5 53.35,36.25 J1.A1
NetJ1_A2: J1.A2 SW2.1 | length 47.2
  Top Layer w0.3: SW2.1 45.6,67.9 53,67.9 54.6,66.3 54.6,39.1 53,37.5 49.3,37.5 J1.A2 ; SW2.1@44,70.05 SW2.1@44.275,69.775
OUT_RX(SDA): OUTPUT.1 SW2.8 | length 35.2
  Top Layer w0.3: SW2.8 36.099,72.099 36.099,72.999 37,73.9 55.9,73.9 59.8,70 62.4,70 63.3,69.1 63.3,67.2 62.45,66.35 61.05,66.35 OUTPUT.1
PD0(SCL): J1.25 SW2.3 | length 32.3
  Top Layer w0.3: v2(33.012,59.013) 33.012,65.812 34.3,67.1 36.9,67.1 38,68.2 SW2.3
  Bottom Layer w0.3: J1.25 21.245,64.75 20.184,63.689 20.184,60.94 22.124,59 33,59 v2(33.012,59.013) ; SW2.3@37.976,69.476 SW2.3
PD1(SDA): J1.26 SW2.7 | length 46.6
  Top Layer w0.3: J1.26 21.57,56.23 v1(21.6,56.2) ; SW2.7 38.23,72.23 38.23,72.83 38.7,73.3 40.9,73.3 42.6,71.6 42.6,68.1 40.6,66.1 40.6,57.776 v2(40.512,57.688)
  Bottom Layer w0.3: v1(21.6,56.2) 34.7,56.2 36.1,57.6 40.424,57.6 v2(40.512,57.688)
PE0(RX0): J1.A6 SW1.2 | length 60.7
  Top Layer w0.3: SW1.2@20.184,69.6 20.184,53.416 21.6,52 v1(21.6,37.9)
  Bottom Layer w0.3: v1(21.6,37.9) 21.7,38 41.9,38 45.23,41.33 J1.A6@48.55,41.33
PE1(TX0): J1.A5 SW1.5 | length 69
  Top Layer w0.3: SW1.5 21.896,74.096 24.3,74.096 24.342,74.054 25.546,74.054 27.9,71.7 27.9,57.6 29.7,55.8 v1(29.7,36.9)
  Bottom Layer w0.3: v1(29.7,36.9) 29.8,36.8 43.1,36.8 46.4,40.1 50.32,40.1 J1.A5
PE2: I/O1.5 J1.4 | length 81.7
  Top Layer w0.3: I/O1.5@12.02,13.08 20.3,21.36 v1(20.3,50.8)
  Bottom Layer w0.3: I/O1.5@12.02,8 I/O1.5@12.02,13.08 ; v1(20.3,50.8) 35.1,50.8 38.2,53.9 43.7,53.9 49.51,59.71 J1.4
PE3: I/O1.6 J1.5 | length 79.8
  Top Layer w0.3: I/O1.6@14.56,13.08 22.956,21.476 22.956,52.956 v1(23,53)
  Bottom Layer w0.3: I/O1.6@14.56,8 I/O1.6@14.56,13.08 ; v1(23,53) 34.3,53 36.8,55.5 42,55.5 45.7,59.2 45.7,63.48 J1.5
PE4: I/O1.7 J1.6 | length 75.1
  Top Layer w0.3: I/O1.7@17.11,13.08 25.496,21.466 25.496,44.269 25.5,44.273 v1(25.5,51.8)
  Bottom Layer w0.3: I/O1.7@17.11,8 I/O1.7@17.11,13.08 ; v1(25.5,51.8) 34.5,51.8 37.4,54.7 42.9,54.7 46.97,58.77 J1.6
PE5: I/O1.8 J1.7 | length 73.9
  Top Layer w0.3: I/O1.8@19.64,13.08 28.036,21.476 28.036,38.237 28.2,38.401 v1(28.2,55)
  Bottom Layer w0.3: I/O1.8@19.64,8 I/O1.8@19.64,13.08 ; v1(28.2,55) 34.9,55 36.3,56.4 41.3,56.4 43.2,58.3 43.2,63.52 J1.7
PF0(ADC0): C5.1 J1.61 R10.1 | length 30.6
  Bottom Layer w0.3: C5.1 R10.1 33,22.196 33,26.9 33,33 33.9,33.9 47.36,33.9 48.6,32.66 J1.61
PF1(ADC1): C7.1 J1.60 R16.1 | length 16.5
  Bottom Layer w0.3: C7.1 R16.1 36.919,24.719 39.6,27.4 45.12,27.4 J1.60
PF2(ADC2): C9.1 J1.59 R22.1 | length 17.9
  Bottom Layer w0.3: C9.1 R22.1 40.919,25.519 42,26.6 46.8,26.6 48.2,28 48.2,30.52 J1.59
PF3(ADC3): C11.1 J1.58 R28.1 | length 9.3
  Top Layer w0.3: J1.58@44.43,28.925 44.43,26.222 44.9,25.752 v1(44.9,25.563)
  Bottom Layer w0.3: C11.1 R28.1 44.9,22.196 v1(44.9,25.563) ; J1.58@44.43,28.925 J1.58
PF4(ADC4): C6.1 J1.57 R13.1 | length 14.2
  Top Layer w0.3: J1.57 45.7,30.48 45.7,28.2 47.3,26.6 v1(48.6,26.6)
  Bottom Layer w0.3: C6.1@46.9,22.196 C6.1 R13.1 48.919,26.281 v1(48.6,26.6)
PF5(ADC5): C8.1 J1.56 R19.1 | length 25.5
  Top Layer w0.3: J1.56 43.2,30.56 43.2,32.6 44.046,33.446 49.978,33.446 50.8,32.624 50.8,27.698 v1(50.919,27.579)
  Bottom Layer w0.3: C8.1 R19.1 52.919,25.579 v1(50.919,27.579)
PF6(ADC6): C10.1 J1.55 R25.1 | length 28
  Top Layer w0.3: J1.55 41.89,32.89 43,34 52.8,34 v1(54.919,31.881)
  Bottom Layer w0.3: C10.1 R25.1 56.919,29.881 v1(54.919,31.881)
PF7(ADC7): C12.1 J1.54 R31.1 | length 36.6
  Top Layer w0.3: J1.54 40.6,30.5 40.6,33.4 42,34.8 55.2,34.8 v1(58.919,31.081)
  Bottom Layer w0.3: C12.1 R31.1 60.719,29.281 v1(58.919,31.081)
PG0: J1.33 R2.1 | length 14.2
  Bottom Layer w0.3: R2.1 5.45,22.75 5.85,23.15 8.3,25.6 8.3,27.6 12.45,31.75 J1.33
PG1: J1.34 R4.1 | length 9.1
  Bottom Layer w0.3: R4.1 9.6,24.9 J1.34
PG2: J1.43 R6.1 | length 20.3
  Bottom Layer w0.3: R6.1 13.846,24.196 14.95,25.3 23.9,25.3 25.496,26.896 25.496,30.596 J1.43
PG3: J1.18 R8.1 | length 51.9
  Top Layer w0.3: v1(29.3,23.2) 29.3,25.8 30.467,26.967 30.467,33.967 31.73,35.23 J1.18
  Bottom Layer w0.3: R8.1 18.2,21.95 19.45,23.2 v1(29.3,23.2)
SW_IN_1: C1.2 I/O1.1 R1.1 R2.2 | length 14.7
  Bottom Layer w0.3: I/O1.1@1.86,8 1.86,14.46 3.25,15.85 R1.1 3.25,19.9 C1.2 R2.2
SW_IN_2: C2.2 I/O1.2 R3.1 R4.2 | length 16.6
  Bottom Layer w0.3: I/O1.2@4.4,8 4.4,13.08 6.32,15 6.85,15 9.85,18 R3.1 9.85,19.8 R4.2 C2.2
SW_IN_3: C3.2 I/O1.3 R5.1 R6.2 | length 16.1
  Bottom Layer w0.3: I/O1.3@6.94,8 6.94,13.08 6.94,13.19 11.75,18 R5.1 11.75,19.954 C3.2 R6.2
SW_IN_4: C4.2 I/O1.4 R7.1 R8.2 | length 19.9
  Bottom Layer w0.3: I/O1.4@9.48,8 9.48,13.08 11.3,14.9 15.05,14.9 18.15,18 R7.1 18.15,19.9 R8.2 C4.2
USB_RX: J1.A3 SW1.6 | length 78.9
  Top Layer w0.3: v1(16.7,36.4) 15.2,37.9 15.2,66.9 14.2,67.9 14.2,72.1 15.4,73.3 17.1,73.3 18,72.4 SW1.6
  Bottom Layer w0.3: v1(16.7,36.4) 18.4,34.7 44.7,34.7 47.5,37.5 50.3,37.5 51.55,38.75 J1.A3
USB_TX: J1.A4 SW1.3 | length 64.5
  Top Layer w0.3: v1(18,38) 18,51.947 17.8,52.147 17.8,69.4 SW1.3
  Bottom Layer w0.3: v1(18,38) 20.3,35.7 44.1,35.7 47.19,38.79 J1.A4@48.55,38.79
pads on no net: BT.1 BT.6 H1.1 H2.1 H3.1 H4.1 H5.1 H6.1 H7.1 INPUT.2 J1.1 J1.2 J1.3 J1.8 J1.9 J1.10 J1.11 J1.12 J1.13 J1.14 J1.15 J1.16 J1.17 J1.19 J1.20 J1.27 J1.28 J1.29 J1.30 J1.31 J1.32 J1.35 J1.36 J1.37 J1.38 J1.39 J1.40 J1.41 J1.42 J1.44 J1.46 J1.47 J1.48 J1.49 J1.50 J1.51 J1.62 J1.64 OUTPUT.2 OUTPUT.MH1 OUTPUT.MH2

## Polygon pours and split planes (outlines as drawn)
12V on Layer 2 "NONET_L03_P001" (solid, shelved, pour order 1): 8.4,66.6 7.1,67.9 7.1,70.1 8.2,71.2 10.8,71.2 13.7,68.3 54.8,68.3 59.748,63.352 59.748,60.948 59.5,60.7 59.3,60.7 57.3,60.7 51.4,66.6
5V on Layer 2 "NONET_L03_P000" (solid, shelved, pour order 0): 8.8,66.1 6.3,63.6 6.437,58.463 11.7,53.2 11.7,31.1 3.7,23.1 2,23.1 1.4,22.5 1.4,4.6 4,2 60.097,2.097 68,10 68,31.827 63.5,36.327 63.5,44.329 68,48.829 68,60.9 66.2,62.7 62.5,62.7 59.9,60.1 56.1,60.1 50.1,66.1
GND on Layer 1 "NONET_L02_P002" (solid, shelved, pour order 2): 10.5,73.5 6.3,69.3 6.3,58.6 11.7,53.2 11.7,31.1 3.7,23.1 2,23.1 1.4,22.5 1.4,4.6 4,2 60.097,2.097 68,10 68,31.827 63.5,36.327 63.5,44.329 68,48.829 68,71.2 65.7,73.5

## Keep-outs
Keep-Out Layer:
  the board outline again, w1

## Silkscreen, mask and mechanical layers (free items; w line width, h text height)
Top Overlay:
  text "USB" at 11.711,72.485 h1.6
  text "BT" at 24.611,72.5 h1.6
  text "Data Transfer V0.1" at 57.646,26.554 h1.52 r90
  text "YK.KIM Project" at 60.838,26.554 h1.52 r90
  text "21.03.05" at 63.146,26.554 h1.52 r90
  text "I1   I2   I3   I4" at 1.071,-0.028 h1.6
  text "O1 O2 O3 O4" at 11.425,-0.058 h1.6
  text "GND +5V" at 20.91,-0.046 h1.6
  text "A1  A2  A3  A4  A5  A6  A7  A8  GND" at 34.568,-0.159 h1.5
Out:
  the board outline again, w0.254

## Dimensions
50,55 to 70,73 on Drill Drawing
50,55 to 68,0 on Drill Drawing
68,75 to 50,55 on Drill Drawing
1.5,67 to 2,75 on Drill Drawing
1.5,59 to 1.5,67 on Drill Drawing
66,44 to 66,36 on Drill Drawing
0,73 to 70,73 on Drill Drawing
2,0 to 0,2 on Drill Drawing
2,0 to 2,75 on Drill Drawing

## Text inside footprints (layer, text, board x,y; h text height)
"ADC IN1": Top Overlay "1" at 35.92,16.72 h1; Top Overlay "9" at 56.02,16.82 h1
BT: Top Overlay "K" at 42.2,52.58 h0.8 r180; Top Overlay "5V" at 42.6,49.98 h0.8 r180; Top Overlay "G" at 42.2,47.48 h0.8 r180; Top Overlay "TX" at 42.6,45.08 h0.8 r180; Top Overlay "RX" at 42.6,42.58 h0.8 r180; Top Overlay "ST" at 42.6,39.98 h0.8 r180
I/O1: Top Overlay "10" at 24.16,16.7 h1; Top Overlay "1" at 1.76,16.892 h1
J1: Top Overlay "6" at 48.502,42.799 h1 r90; Top Overlay "1" at 52.185,34.417 h1 r90; Top Overlay "2" at 48.5,34.2 h1 r90; Top Overlay "5" at 52.058,42.799 h1 r90; Top Overlay "USB" at 13.4,41.6 h1 r270; Top Overlay "SPI" at 13.3,56.2 h1 r270; Top Overlay "1" at 53.745,65.05 h1 r270; Top Overlay "64" at 53.745,29.75 h1 r270; Top Overlay "63" at 53.745,32.85 h1 r270; Top Overlay "2" at 53.745,62.55 h1 r270; Top Overlay "31" at 11.3,65.9 h1 r270; Top Overlay "33" at 10.909,33.05 h1 r270; Top Overlay "34" at 10.909,29.65 h1 r270; Top Overlay "32" at 11.3,63 h1 r270
OUTPUT: Top 3D Body "PCB Edge" at 68.357,71.731 h0.8 r270